# Altium PCB Sampler_DIOT.PCBDOC (part 9 of 10)
Units mm, origin at the board's own origin, x right, y up, seen from the top; angles counter-clockwise.
Board outline 222.9 x 100 mm, 4 copper layers (L1, P2, L3, L4), stack 1.6 mm thick; 697 components, 418 nets, 2175 pads, 1124 vias.
Unrouted connection lines stored in the file: 6.
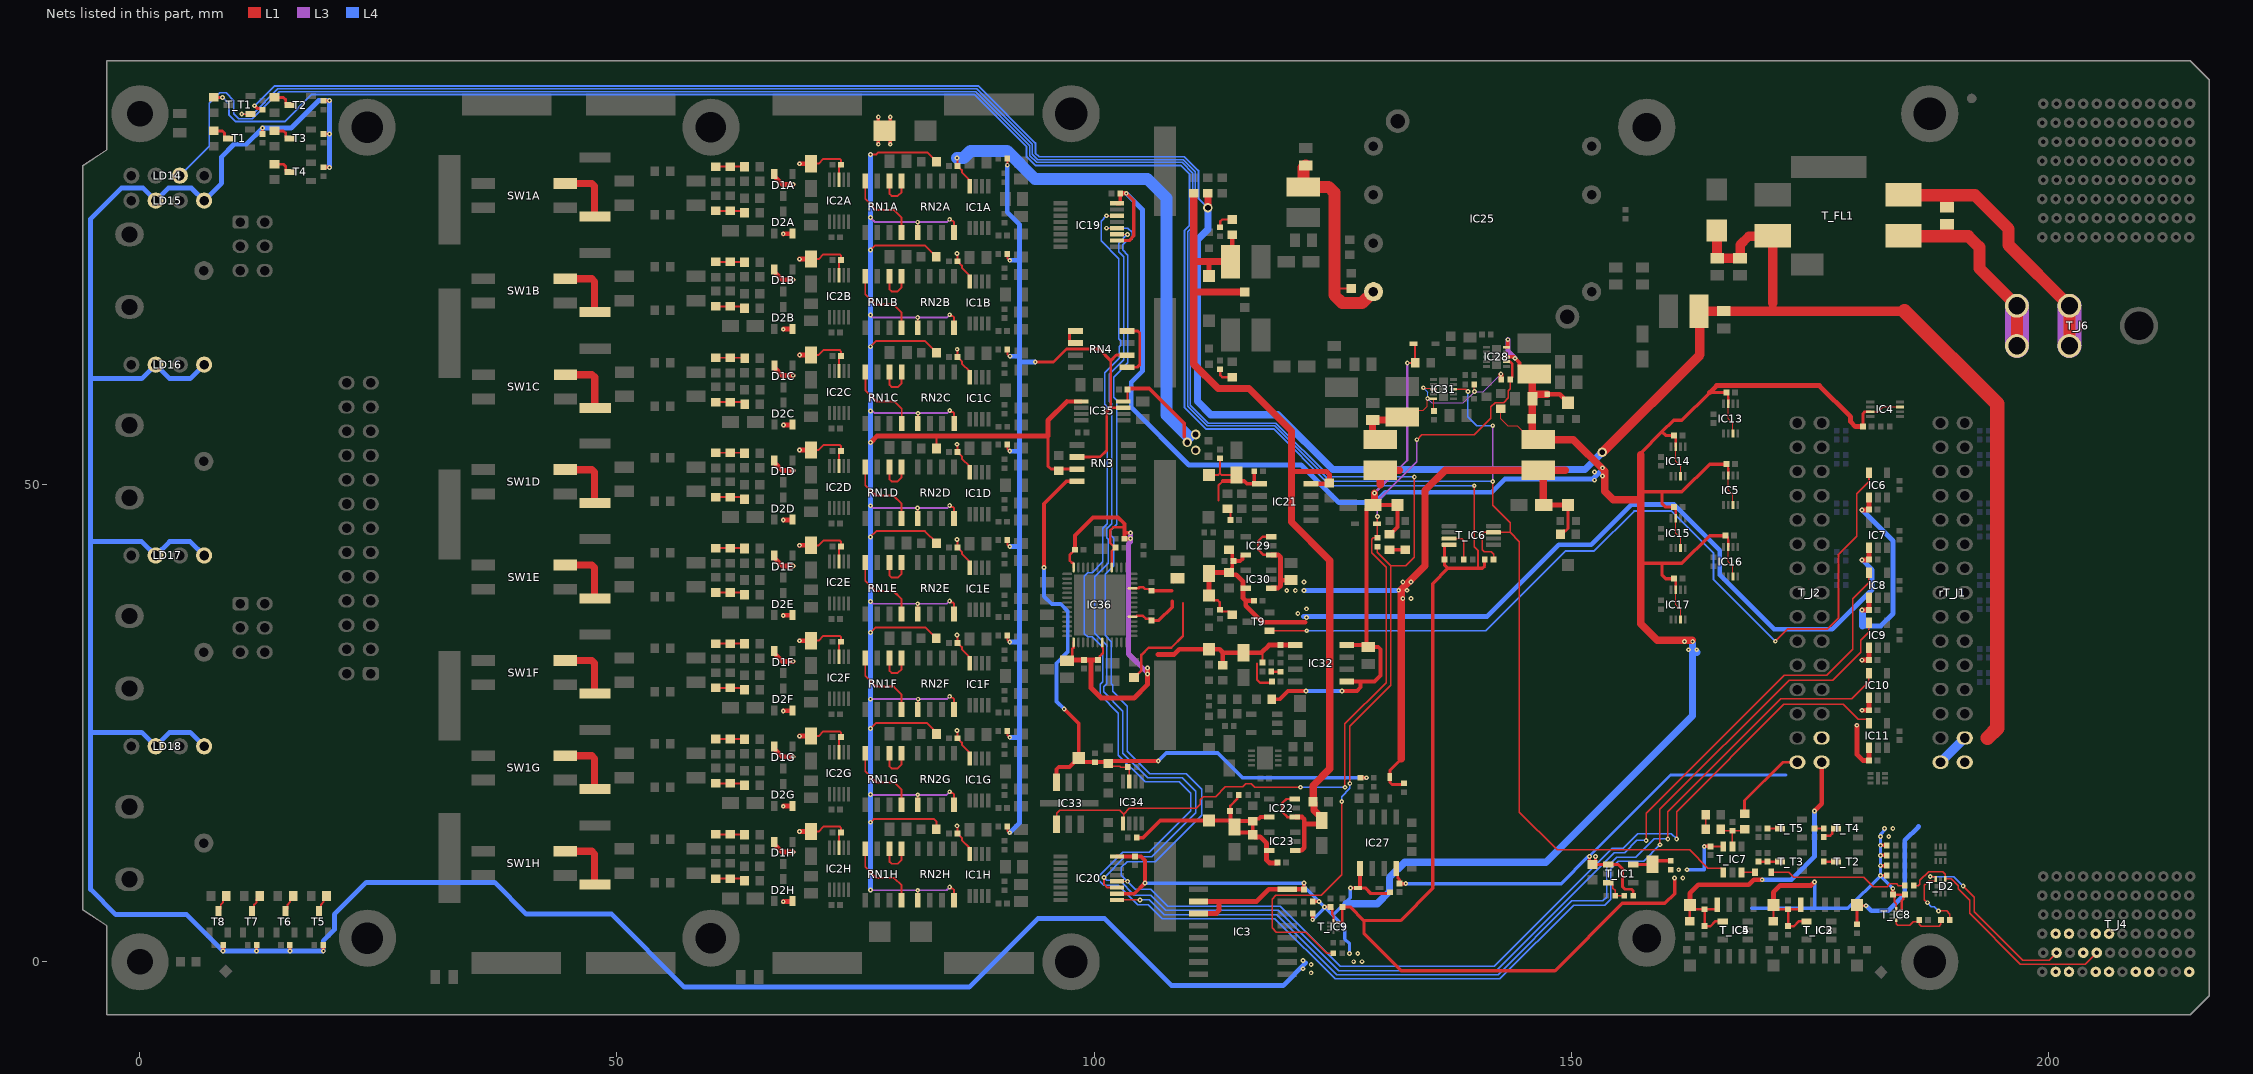
[diagram p9: the nets of this part, all layers, seen from the top]

## Via types
v1: diameter 0.5, hole 0.2, L1 to L4, tented both sides, 1103 vias
v2: diameter 1, hole 0.6, L1 to L4, tented both sides, 15 vias
v3: diameter 0.6, hole 0.3, L1 to L4, tented both sides, 6 vias

## Nets (pads, with @x,y where several pads share a name; then routed paths per layer and width w, separated by ;. In a path a pad name is that pad's centre, name@x,y a point inside that pad or via, vN(x,y) a via of type N, cw(c..) or ccw(c..) an arc to the next point about the centre after c; other vN are vias at no path point) (continued)
NetR2A_2: R2A.2 R3A.1 R4A.2 | length 3
  L1 w0.203: R2A.2@60.352,83.36 R4A.2@61.876,83.36 63.324,83.36 R3A.1@63.362,83.322
NetR2B_2: R2B.2 R3B.1 R4B.2 | length 3
  L1 w0.203: R2B.2@60.352,73.36 63.324,73.36 R3B.1@63.362,73.322
NetR2C_2: R2C.2 R3C.1 R4C.2 | length 3
  L1 w0.203: R2C.2@60.365,63.316 63.337,63.316 R3C.1@63.375,63.278
NetR2D_2: R2D.2 R3D.1 R4D.2 | length 3
  L1 w0.203: R2D.2@60.352,53.36 R4D.2@61.876,53.36 63.324,53.36 R3D.1@63.362,53.322
NetR2E_2: R2E.2 R3E.1 R4E.2 | length 3
  L1 w0.203: R2E.2@60.352,43.36 63.324,43.36 R3E.1@63.362,43.322
NetR2F_2: R2F.2 R3F.1 R4F.2 | length 3
  L1 w0.203: R2F.2@60.352,33.36 R4F.2@61.876,33.36 63.324,33.36 R3F.1@63.362,33.322
NetR2G_2: R2G.2 R3G.1 R4G.2 | length 3
  L1 w0.203: R2G.2@60.352,23.36 63.324,23.36 R3G.1@63.362,23.322
NetR2H_2: R2H.2 R3H.1 R4H.2 | length 3
  L1 w0.203: R2H.2@60.352,13.36 R4H.2@61.876,13.36 63.324,13.36 R3H.1@63.362,13.322
NetR5A_1: R5A.1 SW1A.4 | length 6.4
  L1 w0.203: R5A.1@47.652,78.147 R5A.1@47.694,78.105
  L1 w0.762: SW1A.4@44.586,81.59 47.367,81.59 47.652,81.305 R5A.1@47.652,78.147
NetR5B_1: R5B.1 SW1B.4 | length 6.4
  L1 w0.203: R5B.1@47.652,68.147 R5B.1@47.694,68.105
  L1 w0.762: SW1B.4@44.586,71.59 47.367,71.59 47.652,71.305 R5B.1@47.652,68.147
NetR5C_1: R5C.1 SW1C.4 | length 6.4
  L1 w0.203: R5C.1@47.665,58.103 R5C.1@47.707,58.061
  L1 w0.762: SW1C.4@44.599,61.546 47.38,61.546 47.665,61.261 R5C.1@47.665,58.103
NetR5D_1: R5D.1 SW1D.4 | length 6.4
  L1 w0.203: R5D.1@47.652,48.147 R5D.1@47.694,48.105
  L1 w0.762: SW1D.4@44.586,51.59 47.367,51.59 47.652,51.305 R5D.1@47.652,48.147
NetR5E_1: R5E.1 SW1E.4 | length 6.4
  L1 w0.203: R5E.1@47.652,38.147 R5E.1@47.694,38.105
  L1 w0.762: SW1E.4@44.586,41.59 47.367,41.59 47.652,41.305 R5E.1@47.652,38.147
NetR5F_1: R5F.1 SW1F.4 | length 6.4
  L1 w0.203: R5F.1@47.652,28.147 R5F.1@47.694,28.105
  L1 w0.762: SW1F.4@44.586,31.59 47.367,31.59 47.652,31.305 R5F.1@47.652,28.147
NetR5G_1: R5G.1 SW1G.4 | length 6.4
  L1 w0.203: R5G.1@47.652,18.147 R5G.1@47.694,18.105
  L1 w0.762: SW1G.4@44.586,21.59 47.367,21.59 47.652,21.305 R5G.1@47.652,18.147
NetR5H_1: R5H.1 SW1H.4 | length 6.4
  L1 w0.203: R5H.1@47.652,8.147 R5H.1@47.694,8.105
  L1 w0.762: SW1H.4@44.586,11.59 47.367,11.59 47.652,11.305 R5H.1@47.652,8.147
NetR9A_2: R9A.2 R10A.1 R11A.2 | length 3.1
  L1 w0.203: R9A.2@60.352,78.712 R11A.2@61.876,78.712 63.146,78.712 R10A.1@63.362,78.496
NetR9B_2: R9B.2 R10B.1 R11B.2 | length 3.1
  L1 w0.203: R9B.2@60.352,68.712 63.146,68.712 R10B.1@63.362,68.496
NetR9C_2: R9C.2 R10C.1 R11C.2 | length 3.1
  L1 w0.203: R9C.2@60.365,58.668 63.159,58.668 R10C.1@63.375,58.452
NetR9D_2: R9D.2 R10D.1 R11D.2 | length 3.1
  L1 w0.203: R9D.2@60.352,48.712 63.146,48.712 R10D.1@63.362,48.496
NetR9E_2: R9E.2 R10E.1 R11E.2 | length 3.1
  L1 w0.203: R9E.2@60.352,38.712 63.146,38.712 R10E.1@63.362,38.496
NetR9F_2: R9F.2 R10F.1 R11F.2 | length 3.1
  L1 w0.203: R9F.2@60.352,28.712 R11F.2@61.876,28.712 63.146,28.712 R10F.1@63.362,28.496
NetR9G_2: R9G.2 R10G.1 R11G.2 | length 3.1
  L1 w0.203: R9G.2@60.352,18.712 63.146,18.712 R10G.1@63.362,18.496
NetR9H_2: R9H.2 R10H.1 R11H.2 | length 3.1
  L1 w0.203: R9H.2@60.352,8.712 R11H.2@61.876,8.712 63.146,8.712 R10H.1@63.362,8.496
NetR26_2: R26.2 T1.3 | length 2.1
  L1 w0.3: R26.2@7.7,87.101 8.636,87.101 8.875,86.862 8.875,86.476 9.05,86.301 T1.3@9.25,86.301
NetR28_2: R28.2 T2.3 | length 2.1
  L1 w0.3: R28.2@14.1,90.602 15.036,90.602 15.275,90.363 15.275,89.977 15.45,89.802 T2.3@15.65,89.802
NetR30_2: R30.2 T3.3 | length 2.1
  L1 w0.3: R30.2@14.1,87.101 15.036,87.101 15.275,86.862 15.275,86.476 15.45,86.301 T3.3@15.65,86.301
NetR32_2: R32.2 T4.3 | length 2.1
  L1 w0.3: R32.2@14.1,83.6 15.036,83.6 15.275,83.361 15.275,82.975 15.45,82.8 T4.3@15.65,82.8
NetR34_2: R34.2 T5.3 | length 1.9
  L1 w0.203: T5.3@18.75,5.35 18.973,5.573 18.973,6.002 19.223,6.252 19.223,6.573 R34.2@19.55,6.9
NetR35_2: R35.2 R75.1 | length 0.9
  L1 w0.25: R35.2@118.6,30.424 R75.1@119.546,30.424
NetR37_2: R37.2 T6.3 | length 1.9
  L1 w0.203: T6.3@15.25,5.35 15.473,5.573 15.473,6.002 15.723,6.252 15.723,6.573 R37.2@16.05,6.9
NetR38_2: R38.2 T7.3 | length 1.9
  L1 w0.203: T7.3@11.746,5.35 11.969,5.573 11.969,6.002 12.22,6.252 12.22,6.573 R38.2@12.546,6.9
NetR40_2: R40.2 T8.3 | length 1.9
  L1 w0.203: T8.3@8.243,5.35 8.466,5.573 8.466,6.002 8.717,6.252 8.717,6.573 R40.2@9.043,6.9
NetR45_2: R45.2 R46.1 | length 1.9
  L1 w0.25: R45.2@113.221,77.01 113.221,77.587 113.444,77.81 R46.1@114.5,77.81
NetR50_2: R50.2 R84.1 | length 1.6
  L1 w0.4: R84.1@130.975,43.2 R50.2@132.625,43.2
NetR93_2: R93.2 R94.1 | length 1.9
  L1 w0.25: R93.2@113.221,62.09 113.221,61.513 113.444,61.29 R94.1@114.5,61.29
NetRN1A_4: RN1A.4 RN1A.8 | length 8.1
  L1 w0.203: RN1A.8@76.024,81.76 76.024,79.965 77.195,78.794 79.056,78.794 79.834,78.017 RN1A.4@79.834,76.36
NetRN1A_5: RN1A.5 RN1A.6 | length 4
  L1 w0.203: RN1A.6@78.558,81.857 78.558,80.516 78.794,80.28 79.419,80.28 79.828,80.689 RN1A.5@79.828,81.857
NetRN1B_4: RN1B.4 RN1B.8 | length 8.1
  L1 w0.203: RN1B.8@76.024,71.76 76.024,69.965 77.084,68.905 78.946,68.905 79.834,68.017 RN1B.4@79.834,66.36
NetRN1B_5: RN1B.5 RN1B.6 | length 4
  L1 w0.203: RN1B.6@78.558,71.857 78.558,70.516 78.794,70.28 79.419,70.28 79.828,70.689 RN1B.5@79.828,71.857
NetRN1C_4: RN1C.4 RN1C.8 | length 8.1
  L1 w0.203: RN1C.8@76.037,61.716 76.037,59.921 77.204,58.754 79.066,58.754 79.847,57.973 RN1C.4@79.847,56.316
NetRN1C_5: RN1C.5 RN1C.6 | length 4
  L1 w0.203: RN1C.6@78.571,61.813 78.571,60.472 78.807,60.236 79.432,60.236 79.841,60.646 RN1C.5@79.841,61.813
NetRN1D_4: RN1D.4 RN1D.8 | length 8.1
  L1 w0.203: RN1D.8@76.024,51.76 76.024,49.965 77.11,48.879 78.972,48.879 79.834,48.017 RN1D.4@79.834,46.36
NetRN1D_5: RN1D.5 RN1D.6 | length 4
  L1 w0.203: RN1D.6@78.544,51.93 78.544,50.588 78.78,50.353 79.405,50.353 79.814,50.762 RN1D.5@79.814,51.93
NetRN1E_4: RN1E.4 RN1E.8 | length 8.1
  L1 w0.203: RN1E.8@76.024,41.76 76.024,39.965 77.121,38.868 78.983,38.868 79.834,38.017 RN1E.4@79.834,36.36
NetRN1E_5: RN1E.5 RN1E.6 | length 4
  L1 w0.203: RN1E.6@78.558,41.857 78.558,40.516 78.794,40.28 79.419,40.28 79.828,40.689 RN1E.5@79.828,41.857
NetRN1F_4: RN1F.4 RN1F.8 | length 8.1
  L1 w0.203: RN1F.8@76.024,31.76 76.024,29.965 77.154,28.836 79.015,28.836 79.834,28.017 RN1F.4@79.834,26.36
NetRN1F_5: RN1F.5 RN1F.6 | length 4
  L1 w0.203: RN1F.6@78.558,31.857 78.558,30.516 78.794,30.28 79.419,30.28 79.828,30.689 RN1F.5@79.828,31.857
NetRN1G_4: RN1G.4 RN1G.8 | length 8.1
  L1 w0.203: RN1G.8@76.024,21.76 76.024,19.965 77.177,18.813 79.038,18.813 79.834,18.017 RN1G.4@79.834,16.36
NetRN1G_5: RN1G.5 RN1G.6 | length 4
  L1 w0.203: RN1G.6@78.558,21.857 78.558,20.516 78.794,20.28 79.419,20.28 79.828,20.689 RN1G.5@79.828,21.857
NetRN1H_4: RN1H.4 RN1H.8 | length 8.1
  L1 w0.203: RN1H.8@76.024,11.76 76.024,9.965 77.225,8.764 79.086,8.764 79.834,8.017 RN1H.4@79.834,6.36
NetRN1H_5: RN1H.5 RN1H.6 | length 4
  L1 w0.203: RN1H.6@78.558,11.857 78.558,10.516 78.794,10.28 79.419,10.28 79.828,10.689 RN1H.5@79.828,11.857
NetRN4_1: RN4.1 RN4.2 | length 2.3
  L1 w0.3: RN4.2@98.05,64.86 97.58,64.86 97.43,65.01 97.43,65.98 97.58,66.13 RN4.1@98.05,66.13
NetRN4_5: RN4.5 RN4.8 | length 6.2
  L1 w0.3: RN4.5@103.45,62.32 104.532,62.32 104.792,62.58 104.792,65.928 104.59,66.13 RN4.8@103.45,66.13
NetT_C2_1: T_C2.1 T_IC1.5 T_R2.1 | length 4.1
  L1 w0.35: T_IC1.5@156.525,10.2 158.525,10.2 T_C2.1@158.55,10.225 158.92,10.595 T_R2.1@160.45,10.595
NetT_C11_1: T_C11.1 T_FL1.3 T_J6.1 T_J6.2 | length 32.5
  L1 w1.27: T_FL1.3@184.875,80.35 189.324,80.35 ; 189.4,80.35 192.35,80.35 195.868,76.832 195.868,75.134 T_J6.1@202.235,68.767 T_J6.2@202.235,64.567
  L1 w1.4: T_C11.1@189.4,79.3 189.4,80.274
  L3 w2.5: T_J6.2@202.235,64.567 T_J6.1@202.235,68.767
NetT_C11_2: T_C11.2 T_FL1.1 T_J6.3 T_J6.4 | length 25.5
  L1 w1.27: T_FL1.1@184.875,76.05 189.333,76.05 ; 189.4,76.05 191.65,76.05 192.8,74.9 192.8,72.702 T_J6.3@196.735,68.767 T_J6.4@196.735,64.567
  L1 w1.4: 189.4,76.117 T_C11.2@189.4,77.1
  L3 w2.5: T_J6.4@196.735,64.567 T_J6.3@196.735,68.767
NetT_C13_1: T_C13.1 T_IC7.5 T_R29.1 T_R30.2 | length 4.3
  L1 w0.152: T_R30.2@165.707,13.9 165.871,13.736 T_C13.1@166.919,13.736 ; T_IC7.5@166.919,12.086 T_C13.1@166.919,13.736 ; T_R29.1@168.2,13.9 168.036,13.736 T_C13.1@166.919,13.736
NetT_C14_1: T_C14.1 T_C21.2 | length 1
  L1 w0.25: T_C14.1@175.542,13.977 T_C21.2@176.493,13.977
NetT_C15_1: T_C15.1 T_T5.3 | length 1.3
  L1 w0.254: T_C15.1@170.609,13.977 T_T5.3@171.916,13.977
NetT_C17_1: T_C17.1 T_T2.3 | length 1.3
  L1 w0.25: T_C17.1@176.493,10.5 T_T2.3@177.8,10.5
NetT_C18_1: T_C18.1 T_C19.1 T_T3.3 | length 2.3
  L1 w0.25: T_C18.1@169.658,10.5 T_C19.1@170.609,10.5 T_T3.3@171.916,10.5
NetT_C21_1: T_C21.1 T_T4.3 | length 1.9
  L1 w0.25: T_C21.1@176.493,13.077 176.641,13.225 177.175,13.225 177.4,13.45 177.4,13.777 177.6,13.977 T_T4.3@177.8,13.977
NetT_D2_4: T_D2.4 T_J4.H2 T_R15.2 | length 25.8
  L1 w0.152: T_R15.2@185.942,7.99 186.419,7.99 186.576,8.148 186.576,8.542 187.488,9.454 188.966,9.454 189.231,9.189 T_D2.4@189.231,8.693 189.858,8.693 190.6,7.951 190.6,7.649 191.797,6.452 191.797,5.07 197.108,-0.241 203.91,-0.241 T_J4.H2@205.1,0.95
NetT_D2_6: T_D2.6 T_J4.K2 T_R17.2 | length 25.3
  L1 w0.152: v1(187.375,6.2) 187.05,6.525 187.05,8.031 187.482,8.463 T_D2.6@188.157,8.463 ; v1(187.654,8.932) T_D2.6@188.26,8.932 ; v1(188.507,5.332) 189.368,5.332 189.72,4.98 T_R17.2@189.72,4.4 ; v1(191.105,7.933) 192.262,6.777 192.262,5.263 197.362,0.162 200.112,0.162 T_J4.K2@200.855,0.905
  L4 w0.152: v1(187.375,6.2) 187.786,5.789 188.049,5.789 v1(188.507,5.332) ; v1(187.654,8.932) 190.107,8.932 v1(191.105,7.933)
NetT_D6_2: T_D6.2 T_IC7.3 | length 1.4
  L1 w0.152: T_IC7.3@167.869,9.386 167.874,9.391 T_D6.2@169.276,9.391
NetT_IC1_3: T_IC1.3 T_R4.2 T_R7.2 | length 2.9
  L1 w0.152: T_IC1.3@153.925,8.3 154.175,8.3 154.399,8.076 154.399,7.701 154.62,7.48 T_R7.2@154.62,6.925 T_R4.2@155.68,6.925
NetT_IC6_7: T_IC6.7 T_R25.2 | length 3.6
  L1 w0.152: T_IC6.7@137.225,44.367 138.525,44.367 138.75,44.142 T_R25.2@138.75,42.184
NetT_R9_2: T_R9.2 T_R30.1 | length 1.5
  L1 w0.152: T_R30.1@164.106,13.9 T_R9.2@164.107,15.4
P2V5A: C16.2 C71.2 C75.2 C76.2 C77.1 C92.2 C93.2 C94.2 IC7.1 IC29.5 IC30.5 IC36.31 IC36.37 R70.2 R76.1 R77.1 R91.1 TP10.1 | length 125.6
  L1 w0.25: R77.1@104.194,29.805 104.244,29.805 104.968,30.529 104.968,32.168 105.725,32.925 108.101,32.925 109.325,34.149 109.325,37.6 ; TP10.1@112.05,38.406 112.56,37.896 112.954,37.896 113.2,37.65 R91.1@113.2,36.89 113.365,36.725 113.526,36.725 113.531,36.72 114.18,36.72 R76.1@114.5,36.4
  L1 w0.254: IC36.31@104.039,36.165 104.394,36.165 104.49,36.261 105.133,36.261 105.438,35.956 C92.2@105.98,35.956 ; IC36.37@104.039,39.165 104.68,39.165 104.76,39.246 105.178,39.246 105.345,39.079 105.695,39.079 C93.2@105.878,38.896 ; C94.2@108.329,39.807 C94.2@108.752,40.23
  L1 w0.35: C92.2@106.034,35.782 106.807,35.782 108.2,37.175 108.2,37.8 ; C93.2@106.034,38.896 108.154,38.896
  L1 w0.4: C71.2@114.15,40.8 114.175,40.8 114.45,41.075 114.45,41.27 114.49,41.309 114.49,41.656 ; R70.2@114.15,43.2 114.2,43.2 114.49,42.91 114.49,42.11 C76.2@114.6,42 ; 114.49,41.656 114.49,41.89 C76.2@114.6,42 ; IC29.5@115.9,42.65 115.625,42.65 115.55,42.575 115.55,42.234 115.316,42 C76.2@114.6,42
  L1 w0.508: TP10.1@112.05,38.406 C77.1@112.05,40.7 112.15,40.8 C71.2@114.15,40.8 114.371,40.579 114.917,40.579 115.604,39.892 115.604,39.171 115.625,39.15 IC30.5@115.643,39.15 ; IC30.5@115.604,39.129 115.604,38.148 115.902,37.85 ; IC30.5@115.622,39.129 IC30.5@115.643,39.15 ; IC30.5@115.9,39.15 IC30.5@115.643,39.15 ; C75.2@116.75,37.85 115.902,37.85 ; 122.15,35.6 117.625,35.6 115.902,37.323 115.902,37.85 ; v1(180.502,42.12) 181.227,42.12 IC7.1@181.227,43.42
  L4 w0.5: 121.95,36.188 141.188,36.188 148.721,43.721 152.121,43.721 156.325,47.925 160.825,47.925 165.6,43.15 165.6,40.55 171.285,34.865 177.39,34.865 181.55,39.025 181.55,41.072 v1(180.502,42.12)
  other v1: 122.275,36.1 121.365,36.515 122.275,37
P3V3: C15.2 C17.2 C18.2 C19.2 C20.2 C21.2 C22.2 C23.2 C24.2 C25.2 C27.2 C28.2 C30.2 C32.2 C33.2 C69.2 C70.2 D9.1 IC3.2 IC3.3 IC3.16 IC4.3 IC4.7 IC5.3 IC5.7 IC6.1 IC8.1 IC9.1 IC10.1 IC11.1 IC13.3 IC13.7 IC14.3 IC14.7 IC15.3 IC15.7 IC16.3 IC16.7 IC17.3 IC17.7 IC19.10 IC19.16 IC20.10 IC20.16 IC27.5 IC28.8 IC28.10 L7.2 L8.1 LD15.2 LD15.4 LD16.2 LD16.4 LD17.2 LD17.4 LD18.2 LD18.4 R25.1 R27.1 R29.1 R31.1 R33.1 R36.1 R39.1 R43.1 R65.2 R66.2 R87.2 T_C25.2 T_IC9.1 T_R67.2 T_R68.2 TP17.1 | length 694.9
  L1 w0.127: IC20.16@102.399,11.037 IC20.16@102.444,11.082 ; C33.2@104.287,11.037 C33.2@104.3,11.05 ; R66.2@143.077,57.583 142.691,57.97 R66.2@142.641,57.97 142.641,56.909 143.345,56.205 144.344,56.205 145.821,54.729 146.567,54.729 L8.1@146.571,54.729 ; IC15.7@160.973,46.49 IC15.7@160.977,46.494 160.977,44.944 161.477,44.444 IC15.3@161.477,43.394 ; IC17.7@160.977,38.995 160.977,37.444 161.477,36.944 IC17.3@161.477,35.895 ; IC14.7@160.978,53.994 160.978,52.444 161.478,51.944 IC14.3@161.478,50.894 ; IC16.7@166.478,43.495 166.478,41.944 166.978,41.444 IC16.3@166.978,40.395 ; IC5.7@166.478,50.994 166.478,49.444 166.978,48.944 IC5.3@166.978,47.894 ; IC13.7@166.478,58.494 166.478,56.944 166.978,56.444 IC13.3@166.978,55.394 ; IC4.7@181.367,57.664 182.218,57.664 182.718,58.164 IC4.3@184.467,58.164
  L1 w0.22: T_C25.2@124.977,5.57 124.977,4.979 125.1,4.855 T_IC9.1@125.1,4.23
  L1 w0.25: T_C25.2@124.8,5.746 T_C25.2@124.977,5.57 ; C30.2@160.777,40.17 160.958,39.989 160.958,39.723 160.977,39.704 IC17.7@160.977,38.995 ; C27.2@160.777,47.669 160.958,47.488 160.958,47.223 160.977,47.204 IC15.7@160.977,46.494 ; C25.2@160.778,55.169 160.958,54.988 160.958,54.723 160.978,54.703 IC14.7@160.978,53.994 ; C28.2@166.278,44.67 166.459,44.489 166.459,44.223 166.478,44.204 IC16.7@166.478,43.495 ; C18.2@166.278,52.169 166.459,51.989 166.459,51.723 166.478,51.704 IC5.7@166.478,50.994 ; C24.2@166.278,59.669 166.459,59.488 166.459,59.223 166.478,59.204 IC13.7@166.478,58.494
  L1 w0.3: C17.2@180.6,56.1 180.6,57.475 180.789,57.664 IC4.7@181.367,57.664
  L1 w0.35: v1(8.713,1.124) R43.1@8.713,1.775 ; v1(12.216,1.124) R39.1@12.216,1.775 ; R25.1@12.85,86.746 v1(12.85,87.398) ; v1(15.72,1.124) R36.1@15.72,1.775 ; v1(19.22,1.124) R33.1@19.22,1.775 ; R31.1@19.225,83.27 v1(19.876,83.27) ; R29.1@19.225,86.771 v1(19.876,86.771) ; R27.1@19.225,90.272 v1(19.876,90.272) ; IC19.10@102.399,75.6 103.679,75.6 104.175,76.096 104.175,79.76 v1(103.382,80.554) ; C15.2@122,7.601 v1(122,8.252) ; v1(122.92,4.41) T_R68.2@122.92,5.061 ; T_R67.2@122.92,6.331 v1(123.571,6.331) ; v1(124.149,5.746) T_C25.2@124.8,5.746 ; v1(126.874,7.742) D9.1@127.525,7.742 ; D9.1@127.646,7.742 127.836,7.742 128.433,7.742 129.014,7.161 130.926,7.161 R65.2@131.036,7.272 ; 157.3,49.275 159.536,49.275 ; 157.3,53.328 159.536,55.564 ; 157.445,41.775 159.536,41.775 ; C30.2@160.777,40.17 159.93,40.17 159.536,40.564 159.536,41.775 ; C27.2@160.777,47.669 159.931,47.669 159.536,48.064 159.536,49.275 ; C25.2@160.778,55.169 159.931,55.169 159.536,55.564 ; C28.2@166.278,44.67 164.52,44.67 161.625,41.775 159.536,41.775 ; C18.2@166.278,52.169 164.52,52.169 161.625,49.275 159.536,49.275 ; C24.2@166.278,59.669 164.52,59.669 161.625,56.774 160.746,56.774 159.536,55.564
  L1 w0.381: IC28.8@143.242,63.415 143.996,63.415 v1@144.115,63.295 ; IC28.10@143.242,64.415 143.378,64.55 v1(143.378,65.215) ; v1(144.141,63.27) 144.606,62.804 144.606,62.444 145.415,61.635 L7.2@146.165,61.635
  L1 w0.4: IC20.10@102.399,7.137 104.221,7.137 v1(105.342,8.258) 105.342,10.608 104.913,11.037 104.287,11.037 IC20.16@102.399,11.037 ; IC19.16@102.399,79.5 102.727,79.5 102.752,79.525 C32.2@102.752,80.554 ; D9.1@127.836,7.742 127.881,7.787 IC27.5@127.881,9.792
  L1 w0.5: C69.2@147.532,59.494 148.804,59.494 TP17.1@149.7,58.597 ; 164.52,59.669 165.251,60.4 176.043,60.4 179.3,57.143 179.3,56.6 179.8,56.1 C17.2@180.6,56.1
  L1 w0.508: C32.2@102.902,80.554 v1(103.382,80.554) ; IC3.3@110.955,5.061 112.796,5.061 113.094,5.359 113.094,6.331 ; IC3.2@110.955,6.331 113.094,6.331 ; C15.2@122,7.601 IC3.16@120.255,7.601 118.329,7.601 117.059,6.331 113.094,6.331 ; v1(179.959,24.792) 179.959,21.746 180.586,21.12 C23.2@181.227,21.12 IC11.1@181.227,22.42 ; v1(180.502,26.37) C22.2@181.227,26.37 IC10.1@181.227,27.67 ; v1(180.502,31.62) C21.2@181.227,31.62 IC9.1@181.227,32.92 ; v1(180.502,36.87) 181.227,36.87 C20.2@181.227,36.895 IC8.1@181.227,38.17 ; v1(180.502,47.37) 181.227,47.37 C19.2@181.227,47.395 IC6.1@181.227,48.67
  L1 w0.762: L7.2@146.165,61.635 145.948,61.417 C70.2@145.948,59.018 ; L8.1@146.567,54.729 145.948,55.348 C70.2@145.948,59.018 ; L8.1@146.571,54.729 150.246,54.729 153.525,51.45 153.525,49.325 154.425,48.425 157.3,48.425 ; C69.2@147.512,59.494 146.423,59.494 C70.2@145.948,59.018 ; 157.3,53.167 157.3,49.275 157.3,48.425 ; v1@162.718,33.7 159.05,33.7 157.3,35.45 157.3,48.425
  L3 w0.508: v1(143.378,65.215) 143.378,64.032 v1@144.133,63.277
  L4 w0.35: v1@105.4,8.3 105.448,8.252 v1(122,8.252) 122.029,8.224 122.029,7.874 v1(123.571,6.331) 123.571,6.327 124.149,5.75 v1(124.149,5.746) ; v1(122.92,4.41) 124.12,5.609 124.12,5.718 v1(124.149,5.746) ; v1(126.788,0.875) 126.788,1.876 126.275,2.389 126.275,3.62 125.026,4.869 ; v1(126.874,7.742) 126.874,6.717 125.026,4.869 ; v1(124.149,5.746) 125.026,4.869
  L4 w0.5: 0.323,81.103 -1.972,81.103 -5.183,77.892 -5.183,61.132 -5.183,44.05 -5.183,24.05 -5.183,7.583 -2.546,4.946 4.891,4.946 v1(8.713,1.124) v1(12.216,1.124) v1(15.72,1.124) v1(19.22,1.124) 19.22,2.195 20.375,3.35 20.375,4.975 23.725,8.325 37.175,8.325 40.5,5 49.425,5 57.072,-2.647 86.933,-2.647 94.11,4.53 101.12,4.53 108.135,-2.485 119.815,-2.485 122.2,-0.1
  L4 w0.508: -5.183,24.05 0.181,24.05 LD18.2@1.64,22.591 3.099,24.05 5.261,24.05 LD18.4@6.72,22.591 ; -5.183,44.05 0.181,44.05 LD17.2@1.64,42.591 3.099,44.05 5.261,44.05 LD17.4@6.72,42.591 ; -5.183,61.132 0.181,61.132 LD16.2@1.64,62.591 3.099,61.132 5.261,61.132 LD16.4@6.72,62.591 ; 0.323,81.103 LD15.2@1.64,79.786 2.957,81.103 5.403,81.103 LD15.4@6.72,79.786 8.55,81.616 8.55,84.393 9.857,85.7 11.153,85.7 v1(12.85,87.398) 15.841,87.398 18.715,90.272 v1(19.876,90.272) v1(19.876,86.771) v1(19.876,83.27) ; v1(103.382,80.554) 105.075,78.86 105.075,61.925 103.911,60.761 103.911,58.114 109.95,52.075 121.73,52.075 125.662,48.143 129.458,48.143 130.542,49.227 141.677,49.227 143.05,50.6 152.25,50.6 153.2,51.55 ; v1(180.502,47.37) 183.75,44.122 183.75,36.478 182.488,35.216 180.55,35.216
  L4 w0.762: 126.425,6.1 129.7,6.1 130.975,7.375 130.975,8.85 132.575,10.45 147.375,10.45 162.725,25.8 162.725,32.447 ; v1@162.725,33.575 162.725,32.447 ; 163.181,32.447 162.725,32.447 ; 180.55,35.216 v1@180.55,36.7
  other v1: 122.762,-1.156 121.9,-0.725 122.762,-0.294 127.219,0.013 128.081,0.013 121.9,0.137 127.65,0.875 162.319,32.713 163.181,32.713 161.888,33.575 162.75,33.575 152.45,50.488 153.312,50.919 152.45,51.35 153.312,51.781
P3V3_MP: R89.2 rT_J1.30 T_C3.2 T_C4.2 T_C8.2 T_C20.2 T_C22.2 T_C23.2 T_C24.2 T_IC2.4 T_IC3.8 T_IC6.8 T_IC7.6 T_IC8.1 T_IC8.8 T_IC9.8 T_R1.2 T_R2.2 T_R8.2 T_R31.2 T_R32.2 T_R33.2 T_R34.2 TP18.1 | length 327.1
  L1 w0.152: rT_J1.30@191.12,20.92 rT_J1.30@191.27,20.92
  L1 w0.2: v1(139.857,49.898) 139.857,43.518 140.245,43.13 140.245,41.249 ; T_C22.2@183.9,6.873 183.9,6.271 184.091,6.08 T_IC8.1@184.091,5.488
  L1 w0.25: T_IC9.8@125.575,4.1 125.853,4.1 126.037,4.284 T_C24.2@126.037,5.734
  L1 w0.254: T_C20.2@164.62,12.086 T_IC7.6@165.969,12.086 ; R89.2@171.221,4.249 TP18.1@171.221,5.72 ; TP18.1@171.304,5.72 171.511,5.513 T_C4.2@172.753,5.513 ; T_IC3.8@174.078,5.984 174.078,5.686 173.905,5.513 T_C4.2@172.753,5.513 ; T_C22.2@183.9,6.873 T_C22.2@183.73,7.042 T_C23.2@185,7.042 184.827,6.869 184.827,6.565 184.665,6.403 T_IC8.8@184.665,5.373 ; T_C4.2@172.753,5.513 T_C3.2@172.753,3.734 173.361,3.734 173.861,4.234 ; 173.861,4.234 T_IC2.4@174.683,4.234 173.861,4.234
  L1 w0.35: T_R1.2@7.75,90.602 v1(8.655,90.602) ; T_C24.2@126.05,5.746 126.879,5.746 128.3,4.325 ; T_IC6.8@137.225,43.717 136.788,43.717 136.738,43.667 T_C8.2@136.738,42.184 136.738,41.612 137.101,41.249 ; T_R8.2@140.935,42.184 140.935,41.485 140.699,41.249 140.245,41.249 137.101,41.249 ; v1(160.857,8.793) 160.857,7.132 159.85,6.125 155.375,6.125 148.325,-0.925 132.22,-0.925 128.3,2.995 128.3,4.325 ; v1(163.969,12.096) T_C20.2@164.62,12.096 ; v1(182.441,9.044) T_R31.2@183.092,9.044 ; v1(182.441,10.078) T_R32.2@183.092,10.078 ; v1(182.441,11.153) T_R33.2@183.092,11.153 ; v1(182.441,12.207) T_R34.2@183.092,12.207 ; T_C22.2@183.73,7.042 183.73,7.688 v1(183.732,7.691) ; 128.3,4.325 132.129,4.325 135.5,7.696 135.5,39.648 137.101,41.249
  L1 w0.5: TP18.1@171.221,5.803 TP18.1@171.221,5.949 171.221,7.3 171.929,8.008 175.171,8.008 v1(175.531,8.368)
  L4 w0.2: v1(8.655,90.602) 9.325,89.933 9.325,88.8 10.046,88.079 15.15,88.079 17.972,90.9 87.475,90.9 92.944,85.431 92.944,84.381 93.855,83.47 109.102,83.47 110.029,82.543 110.029,77.204 109.486,76.661 109.486,58.08 111.714,55.852 118.819,55.852 124.773,49.898 v1(139.857,49.898)
  L4 w0.35: v1(162.15,9.655) 163.969,9.655 v1(163.969,12.096) ; 168.95,5.6 175.531,5.6 ; v1(175.531,8.368) 175.531,5.6 ; v1@182.95,13.9 182.441,13.391 v1(182.441,13.125) v1(182.441,12.207) v1(182.441,11.153) v1(182.441,10.078) v1(182.441,9.044) ; v1(183.732,7.691) 182.441,8.982 v1(182.441,9.044) ; 175.531,5.6 178.997,5.6 v1(182.441,9.044)
  other v1: 161.719,8.793 161.288,9.655 183.303,13.125 182.872,13.987 183.735,13.987
P3V3_MP2: R90.2 T_C5.2 T_C6.2 T_IC4.4 T_IC5.8 T_J2.30 TP19.1 | length 35.3
  L1 w0.254: R90.2@162.465,4.249 TP19.1@162.465,5.72 ; TP19.1@162.755,5.513 T_C6.2@163.997,5.513 ; T_IC5.8@165.323,5.984 165.323,5.686 165.15,5.513 T_C6.2@163.997,5.513 ; T_C6.2@163.997,5.513 T_C5.2@163.997,3.734 164.605,3.734 165.105,4.234 ; 165.105,4.234 T_IC4.4@165.928,4.234 165.105,4.234
  L1 w0.5: TP19.1@162.465,5.874 162.465,7.19 163.348,8.073 168.623,8.073 169.151,8.601 v1(170.034,8.601) ; v1(175.514,15.805) 176.27,16.561 T_J2.30@176.27,20.92
  L4 w0.5: v1(170.034,8.601) 173.101,8.601 175.514,11.014 v1(175.514,15.805)
P3V3A: C67.1 C68.2 D7.1 IC29.1 IC29.3 IC30.1 L8.2 R60.2 R88.2 TP11.1 | length 79.7
  L1 w0.25: IC29.1@118.6,42.65 117.775,42.65 117.22,43.204 117.22,44.095 117.675,44.55 IC29.3@118.6,44.55
  L1 w0.3: 132.198,21.273 131.011,20.086 D7.1@131.011,19.382 131.011,18.802 131.241,18.573 132.373,18.573 R60.2@132.511,18.712 ; R88.2@148.9,44.8 148.9,44.85 149.2,45.15 149.438,45.15 149.7,45.412 TP11.1@149.7,47.88
  L1 w0.5: IC30.1@118.6,39.15 118.625,39.175 119.282,39.175 119.55,39.443 119.55,40 ; IC29.1@118.6,42.65 119.3,42.65 119.55,42.4 119.55,40 ; C68.2@120.65,40 119.55,40 ; C67.1@147.15,47.88 TP11.1@149.7,47.88
  L1 w0.762: 132.198,21.273 132.198,39.023 134.7,41.525 134.7,49.425 136.804,51.529 L8.2@146.571,51.529 ; C67.1@147.1,48.15 147.1,50.999 L8.2@146.571,51.529 ; 149.42,51.529 L8.2@146.571,51.529
  L4 w0.5: v1(122,38.915) 132.39,38.915 132.4,38.925
  other v1: 132.369,38.088 133.231,38.088 120.2,38.915 121.1,38.915 131.938,38.95 132.8,38.95 122,39.815 132.369,39.812 133.231,39.812
P5V0A: C82.1 C83.2 C84.1 C87.2 C88.2 C89.2 C90.2 C91.2 IC32.1 IC36.15 IC36.21 IC36.44 IC36.52 R73.2 R78.2 R85.2 TP13.1 | length 74.7
  L1 w0.25: 117.089,31.275 117.089,29.561 117.4,29.25 118.507,29.25 C82.1@118.646,29.389 ; 117.55,32.4 117.66,32.29 R73.2@117.66,31.364 R73.2@117.618,31.406
  L1 w0.254: C91.2@97.323,31.604 97.371,31.652 97.7,31.98 97.7,32.775 97.864,32.939 IC36.15@97.864,33.49 ; IC36.52@97.864,41.34 97.864,41.736 97.774,41.826 97.683,41.826 97.438,42.07 97.438,42.635 C90.2@98,43.197 ; C87.2@100.432,31.65 100.615,31.833 100.615,32.025 100.944,32.354 100.944,32.867 100.864,32.948 IC36.21@100.864,33.49 ; IC36.44@101.864,41.34 101.864,43.052 C89.2@102.219,43.407 ; C89.2@102.258,43.447 C89.2@102.219,43.407 ; 103.187,45.55 102.022,45.55 101.694,45.223 101.694,43.932 C89.2@102.219,43.407
  L1 w0.35: 103.177,44.969 103.187,44.969 v1(103.829,44.969) ; R78.2@103.187,44.361 v1(103.838,44.361)
  L1 w0.4: C90.2@98,43.197 98,44.675 99.9,46.575 102.525,46.575 103.187,45.913 103.187,45.55 103.187,44.969 R78.2@103.187,44.361
  L1 w0.508: C91.2@97.155,31.557 97.25,31.652 97.371,31.652 C88.2@98.932,31.652 ; C88.2@98.933,31.65 99.683,31.65 ; C87.2@100.432,31.65 99.683,31.65 ; v1(105.597,30.787) 105.597,29.041 104.211,27.655 100.745,27.655 99.683,28.717 99.683,31.65 ; 106.7,32.225 108.4,32.225 108.938,32.763 TP13.1@112.05,32.763 113.162,32.763 113.5,32.425 ; R85.2@113.5,31.1 113.5,32.425 ; IC32.1@121.096,33.199 119.547,33.2 118.35,33.2 117.55,32.4 C84.1@115.65,32.4 113.525,32.4 113.5,32.425
  L3 w0.508: v1(103.829,44.969) 103.829,44.015 103.618,43.804 103.618,32.266 105.597,30.287 v1@105.597,30.13
  other v1: 105.607,30.179
P6V0: C78.2 C79.2 IC31.8 IC31.10 L9.2 L10.1 R69.2 R72.2 | length 24.1
  L1 w0.127: L9.2@132.547,57.113 132.547,57.79 134.523,57.79 134.95,58.217 v1@134.95,58.979 ; v1(134.523,60.17) 134.594,60.098 135.229,60.098 135.241,60.087 135.241,60.055 135.556,60.055 IC31.8@135.591,60.02 ; v1@135.209,59.02 IC31.10@135.591,59.02 135.591,57.72 C78.2@135.641,57.72 ; R72.2@139.861,60.52 139.861,59.8 v1(139.891,59.77) ; v1(142.641,61.615) v1@142.671,61.585
  L1 w0.508: R69.2@142.671,61.02 v1@142.671,61.585
  L1 w0.762: L10.1@130,54.729 129.2,55.529 C79.2@129.2,56.8 131.881,56.8 L9.2@132.176,57.095
  L3 w0.127: v1@134.991,59.02 135.406,58.604 138.725,58.604 v1(139.891,59.77) 140.796,59.77 v1(142.641,61.615)
  L4 w0.127: v1(134.523,60.17) 134.976,59.717 v1(134.976,59.058)
P6V0A: C80.1 C81.2 D8.1 IC32.5 IC32.8 L10.2 R53.2 R64.2 R84.2 TP12.1 | length 65.5
  L1 w0.254: v1(132.841,62.77) R64.2@133.648,62.77 ; D8.1@133.501,64.77 133.545,64.77 133.648,64.667 133.648,62.838 R64.2@133.691,62.795
  L1 w0.4: R53.2@118.637,27.5 118.65,27.513 119.453,27.513 120.337,28.397 v1(122.22,28.397) ; v1(125.993,28.397) 127.553,28.397 127.943,28.786 127.943,29.389 ; IC32.5@126.496,29.389 127.943,29.389 ; IC32.8@126.496,33.199 C81.2@128.551,33.199 ; R84.2@130.975,44.8 131.025,44.8 131.8,45.575 TP12.1@131.8,47.88 C80.1@129.244,47.88 128.983,47.88 128.558,47.455 128.558,33.192 C81.2@128.75,33 129.791,33 130.025,32.766 130.025,30.025 129.389,29.389 127.943,29.389
  L1 w0.762: C80.1@129.244,47.88 129.394,48.03 v1(129.394,49.13) ; L10.2@129.394,51.394 L10.2@130,52 ; 130,50 L10.2@130,51.529 132.004,51.529
  L3 w0.254: v1(129.394,49.13) 132.841,52.577 v1(132.841,62.77)
  L4 w0.4: v1(122.22,28.397) v1(125.993,28.397)
P12V0: C29.2 C57.2 IC27.8 L4.1 R47.2 R86.2 rT_J1.28 rT_J1.29 T_C1.2 T_C9.2 T_C10.2 T_D5.1 T_FL1.2 T_IC1.1 T_J2.28 T_J2.29 T_J4.A1 T_J4.D1 T_J4.E1 T_J4.G1 T_J4.H1 T_J4.J1 T_J4.K1 T_R3.2 T_R4.1 T_R29.2 TP2.1 | length 367.4
  L1 w0.3: IC27.8@131.691,9.792 131.841,9.642 131.841,8.809 132.025,8.625 C29.2@132.025,8.2 ; T_C1.2@151.925,10.483 v1(151.925,11.035) ; T_C1.2@152.25,10.2 T_IC1.1@153.925,10.2 154.951,10.2 155.414,9.737 155.414,7.849 155.658,7.604 156.349,7.604 156.525,7.429 156.525,6.93 T_R4.1@156.52,6.925 ; T_C1.2@152.575,10.483 v1(152.575,11.035) ; T_R29.2@168.2,15.5 168.2,16.899 172.221,20.92 T_J2.29@173.73,20.92 ; R47.2@179.977,4.219 TP2.1@179.977,5.803 ; TP2.1@180.375,5.874 v1(180.927,5.874)
  L1 w0.35: v1(12.008,89.728) 12.289,89.447 12.735,89.447 T_R3.2@12.85,89.332 ; C29.2@132.025,8.2 v1(132.676,8.2)
  L1 w0.762: v2@111.944,79.081 R86.2@111.944,80.58
  L1 w1: v2(153.275,53.4) 163.5,63.625 163.5,68.1 L4.1@163.4,68.2 C57.2@166,68.2 184.962,68.2 ; T_D5.1@165.3,76.65 165.3,73.78 T_C10.2@165.33,73.75 T_C9.2@167.73,73.75 167.73,75.15 168.63,76.05 T_FL1.2@171.15,76.05 ; 171.15,69.014 T_FL1.2@171.15,76.05 ; T_FL1.2@171.15,76.1 T_FL1.2@171.15,76.05
  L1 w1.5: 184.962,68.2 194.677,58.486 194.677,24.48 193.656,23.46
  L4 w0.2: v1(12.008,89.728) 14.102,91.821 87.857,91.821 93.865,85.813 93.865,84.763 94.237,84.391 109.484,84.391 110.95,82.925 110.95,80.049 v2(111.944,79.055)
  L4 w0.3: v1@151.954,11.105 160.424,19.575 172.527,19.575
  L4 w0.35: v1(132.676,8.2) 148.97,8.2 151.776,11.007 151.856,11.007 151.876,11.027 151.876,11.084 151.933,11.084 v1@151.954,11.105
  L4 w0.5: v1(180.927,5.874) 181.46,5.341 183.25,5.341 184.97,7.061 184.97,12.72 186.425,14.175
  L4 w0.508: 134.255,51.63 134.285,51.6 134.325,51.56
  L4 w0.762: v2(111.944,79.055) 111.944,76.794 110.85,75.7 110.85,58.75 112.244,57.356 119.269,57.356 125.025,51.6 134.285,51.6 151.475,51.6 v2(153.275,53.4)
  L4 w1: rT_J1.29@188.73,20.92 rT_J1.28@191.27,23.46
P12V0A: C8A.1 C8B.1 C8C.1 C8D.1 C8E.1 C8F.1 C8G.1 C8H.1 C9A.2 C9B.2 C9C.2 C9D.2 C9E.2 C9F.2 C9G.2 C9H.2 C13A.2 C13B.2 C13C.2 C13D.2 C13E.2 C13F.2 C13G.2 C13H.2 C38.1 C39.2 C40.1 C104.2 D1A.2 D1B.2 D1C.2 D1D.2 D1E.2 D1F.2 D1G.2 D1H.2 D2A.2 D2B.2 D2C.2 D2D.2 D2E.2 D2F.2 D2G.2 D2H.2 D5.1 IC1A.8 IC1B.8 IC1C.8 IC1D.8 IC1E.8 IC1F.8 IC1G.8 IC1H.8 IC2A.8 IC2B.8 IC2C.8 IC2D.8 IC2E.8 IC2F.8 IC2G.8 IC2H.8 IC21.1 IC35.8 R48.2 R51.2 TP7.1 | length 187.5
  L1 w0.203: C8H.1@70.329,13.658 71.129,13.658 71.632,14.161 73.364,14.161 73.475,14.05 C9H.2@73.475,13.55 73.275,13.35 IC2H.8@73.275,11.967 ; C8G.1@70.329,23.658 71.129,23.658 71.632,24.161 73.364,24.161 73.475,24.05 C9G.2@73.475,23.55 ; C8F.1@70.329,33.658 71.129,33.658 71.632,34.161 73.364,34.161 73.475,34.05 C9F.2@73.475,33.55 ; C8E.1@70.329,43.658 71.129,43.658 71.632,44.161 73.364,44.161 73.475,44.05 C9E.2@73.475,43.55 ; C8D.1@70.329,53.658 71.129,53.658 71.632,54.161 73.364,54.161 73.475,54.05 C9D.2@73.475,53.55 ; C8B.1@70.329,73.658 71.129,73.658 71.632,74.161 73.364,74.161 73.475,74.05 C9B.2@73.475,73.55 ; C8A.1@70.329,83.658 71.129,83.658 71.632,84.161 73.364,84.161 73.475,84.05 C9A.2@73.475,83.55 ; C8C.1@70.341,63.614 71.141,63.614 71.639,64.111 ; 71.632,64.111 71.639,64.111 ; 71.645,64.117 71.639,64.111 ; IC2G.8@73.275,21.967 73.275,23.258 C9G.2@73.465,23.448 ; IC2F.8@73.275,31.967 73.275,33.258 C9F.2@73.465,33.448 ; IC2E.8@73.275,41.967 73.275,43.258 C9E.2@73.465,43.448 ; IC2D.8@73.275,51.967 73.275,53.258 C9D.2@73.465,53.448 ; IC2B.8@73.275,71.967 73.275,73.258 C9B.2@73.465,73.448 ; IC2A.8@73.275,81.967 73.275,83.258 C9A.2@73.465,83.448 ; IC2C.8@73.288,61.923 73.288,63.214 C9C.2@73.478,63.404 ; C9C.2@73.475,63.5 73.475,64 73.364,64.111 71.639,64.111 ; v1(85.644,14.255) 85.694,14.205 C13H.2@85.694,13.43 86.144,12.98 86.144,12.755 86.969,11.93 IC1H.8@86.969,11.309 ; v1(85.644,24.255) 85.694,24.205 C13G.2@85.694,23.43 86.144,22.98 86.144,22.755 86.969,21.93 IC1G.8@86.969,21.309 ; v1(85.644,34.255) 85.694,34.205 C13F.2@85.694,33.43 86.144,32.98 86.144,32.755 86.969,31.93 IC1F.8@86.969,31.309 ; v1(85.644,44.255) 85.694,44.205 C13E.2@85.694,43.43 86.144,42.98 86.144,42.755 86.969,41.93 IC1E.8@86.969,41.309 ; v1(85.644,54.255) 85.694,54.205 C13D.2@85.694,53.43 86.144,52.98 86.144,52.755 86.969,51.93 IC1D.8@86.969,51.309 ; v1(85.644,74.255) 85.694,74.205 C13B.2@85.694,73.43 86.144,72.98 86.144,72.755 86.969,71.93 IC1B.8@86.969,71.309 ; v1(85.644,84.255) 85.694,84.205 C13A.2@85.694,83.43 86.144,82.98 86.144,82.755 86.969,81.93 IC1A.8@86.969,81.309 ; v1(85.657,64.211) 85.707,64.161 C13C.2@85.707,63.386 86.157,62.936 86.157,62.711 86.982,61.886 IC1C.8@86.982,61.265 ; IC35.8@103.075,58.725 103.383,58.725 103.506,58.848 C104.2@103.506,59.995 ; TP7.1@112.05,51.025 113.025,51.025 113.2,51.2 ; 113.05,48.362 113.05,49.947 113.493,50.39 ; R48.2@113.2,52.76 113.2,51.2 ; R51.2@113.943,47.469 R51.2@113.993,47.469 114.293,47.169 C40.1@114.293,46.298 ; C38.1@114.402,50.39 114.925,50.913 C38.1@114.925,50.922 ; C38.1@115.448,50.398 C38.1@114.925,50.922 ; IC21.1@116.8,50.306 116.998,50.108 IC21.1@117.334,50.108 ; 113.2,51.2 113.375,51.025 C38.1@114.925,51.025 C38.1@114.925,50.922
  L1 w0.35: v1(77.394,85.7) D5.1@77.394,86.605 ; D5.1@77.394,87.655 v1(77.394,88.56) ; v1(78.644,85.7) D5.1@78.644,86.605 ; D5.1@78.644,87.655 v1(78.644,88.56)
  L1 w0.4: C104.2@103.506,59.995 103.615,60.104 105.784,60.104 109.454,56.435 109.454,55.07 ; 113.493,50.39 C38.1@114.402,50.39 ; C38.1@115.448,50.398 115.736,50.398 116.026,50.108 IC21.1@116.998,50.108 ; IC21.1@116.8,50.306 C39.2@116.8,51.425
  L1 w0.508: D1H.2@66.483,12.568 66.483,12.338 67.327,11.494 v1(68.457,11.494) ; D1G.2@66.483,22.568 66.483,22.338 67.327,21.494 v1(68.457,21.494) ; D1F.2@66.483,32.568 66.483,32.338 67.327,31.494 v1(68.457,31.494) ; D1E.2@66.483,42.568 66.483,42.338 67.327,41.494 v1(68.457,41.494) ; D1D.2@66.483,52.568 66.483,52.338 67.327,51.494 v1(68.457,51.494) ; D1B.2@66.483,72.568 66.483,72.338 67.327,71.494 v1(68.457,71.494) ; D1A.2@66.483,82.568 66.483,82.338 67.327,81.494 v1(68.457,81.494) ; D1C.2@66.496,62.524 66.496,62.294 67.339,61.45 v1(68.47,61.45) ; v1(67.428,6.304) 67.446,6.322 D2H.2@68.338,6.322 ; v1(67.428,16.304) 67.446,16.322 D2G.2@68.338,16.322 ; v1(67.428,26.304) 67.446,26.322 D2F.2@68.338,26.322 ; v1(67.428,36.304) 67.446,36.322 D2E.2@68.338,36.322 ; v1(67.428,46.304) 67.446,46.322 D2D.2@68.338,46.322 ; v1(67.428,66.304) 67.446,66.322 D2B.2@68.338,66.322 ; v1(67.428,76.304) 67.446,76.322 D2A.2@68.338,76.322 ; v1(67.44,56.26) 67.459,56.278 D2C.2@68.35,56.278 ; v1(69.135,13.653) 69.14,13.658 C8H.1@70.329,13.658 ; v1(69.135,23.653) 69.14,23.658 C8G.1@70.329,23.658 ; v1(69.135,33.653) 69.14,33.658 C8F.1@70.329,33.658 ; v1(69.135,43.653) 69.14,43.658 C8E.1@70.329,43.658 ; v1(69.135,53.653) 69.14,53.658 C8D.1@70.329,53.658 ; v1(69.135,73.653) 69.14,73.658 C8B.1@70.329,73.658 ; v1(69.135,83.653) 69.14,83.658 C8A.1@70.329,83.658 ; v1(69.148,63.609) 69.152,63.614 C8C.1@70.341,63.614
  L4 w1.27: v1(85.644,84.255) 86.319,84.255 87.045,84.981 90.892,84.981 93.802,82.071 105.579,82.071 107.618,80.032 107.618,57.307 109.9,55.025
  other v2: 110.65,53.6 109.775,54.438 110.65,55.275
P13V0: C37.2 C43.2 C47.1 C51.2 IC21.8 IC22.1 IC22.3 IC23.1 L3.2 R41.2 R46.2 TP1.1 | length 106.4
  L1 w0.203: IC22.3@121.044,17.115 IC22.3@121.047,17.111
  L1 w0.25: IC22.1@121.094,15.169 IC22.1@121.044,15.169 120.269,15.169 119.714,15.723 119.714,16.614 120.169,17.069 IC22.3@121.044,17.069 IC22.3@121.094,17.069
  L1 w0.5: TP1.1@112.05,71.9 112.05,73.38 ; L3.2@114.5,73.6 R46.2@114.5,76.21 ; 120.694,51.425 120.719,51.4 124.375,51.4 124.675,51.1 124.675,50.213 C37.2@124.679,50.209 124.578,50.108 IC21.8@122.734,50.108 ; IC23.1@121.094,11.669 121.119,11.694 121.776,11.694 122.044,11.962 122.044,14.434 ; IC22.1@121.094,15.169 121.794,15.169 122.044,14.919 122.044,14.434 ; C47.1@123.875,14.8 123.509,14.434 122.044,14.434
  L1 w0.762: 110.444,71.671 R41.2@110.444,80.58 ; 110.448,71.771 110.448,62.649 113.01,60.088 116.237,60.088 120.694,55.631 120.694,51.425 120.694,46.094 124.724,42.064 124.724,20.224 122.975,18.475 C43.2@122.975,16.8 123.069,16.706 123.069,15.881 123.875,15.075 C47.1@123.875,14.8 ; 110.494,70.2 C51.2@115.819,70.2 ; 110.558,73.4 L3.2@114.3,73.4
  L1 w1.016: L3.2@114.3,73.4 L3.2@114.5,73.6
P13V0S: C48.2 IC25.7 L2.1 R56.2 | length 23.3
  L1 w0.203: 125.194,70.58 R56.2@126.944,70.58
  L1 w1.27: C48.2@122.194,83.48 121.944,83.23 L2.1@121.944,81.23 124.594,81.23 125.194,80.63 125.194,70.58 125.194,69.88 126.022,69.052 128.101,69.052 IC25.7@129.294,70.245
PGIA-CS: IC11.5 IC19.12 IC20.12 | length 183.2
  L1 w0.127: v1(101.297,76.9) IC19.12@102.399,76.9 ; IC20.12@102.399,8.437 v1(103.501,8.437)
  L1 w0.152: v1(161.075,12.875) 161.075,15.756 172.315,26.996 178.554,26.996 180.125,25.425 181.028,25.425 181.227,25.227 IC11.5@181.227,25.02
  L4 w0.152: v1(101.297,76.9) 103.55,76.9 104,76.45 104,75.801 103.824,75.625 103.51,75.625 103.037,75.152 103.037,74.613 103.563,74.086 103.563,62.773 102.075,61.285 102.075,59.152 102.39,58.837 102.39,45.89 101.75,45.25 101.75,44.7 102.05,44.4 102.05,41.5 101.161,40.611 101.161,34.214 101.814,33.561 101.814,29.136 101.942,29.008 101.942,28.358 103.499,26.801 103.499,22.066 105.833,19.732 109.65,19.732 111.27,18.113 111.27,15.355 106.404,10.489 103.464,10.489 102.875,9.9 102.875,9.062 v1(103.501,8.437) 104.312,7.625 105.925,7.625 107.72,5.83 119.52,5.83 125.82,-0.47 141.974,-0.47 154.329,11.885 155.474,11.885 157.014,13.425 160.525,13.425 v1(161.075,12.875)
PGIA-MISO: IC10.5 IC20.9 | length 99.3
  L1 w0.152: IC20.9@102.399,6.487 IC20.9@102.4,6.486 ; IC20.9@102.4,6.487 104.817,6.487 v1@104.818,6.486 ; v1(160.15,12.875) 160.15,15.731 171.969,27.55 179.441,27.55 181.227,29.336 IC10.5@181.227,30.27
  L4 w0.152: v1(104.818,6.487) 105.784,6.487 107.345,4.925 119.145,4.925 125.445,-1.375 142.349,-1.375 150.099,6.375 153.35,6.375 153.73,6.755 153.73,9.922 154.788,10.98 156.809,10.98 158.704,12.875 v1(160.15,12.875)
PGIA-MOSI: IC9.5 IC19.14 | length 192.4
  L1 w0.127: v1(101.297,78.2) IC19.14@102.399,78.2
  L1 w0.152: v1(159.325,12.275) 159.325,15.981 172.875,29.531 177.427,29.531 180.347,32.451 180.347,33.685 181.227,34.565 IC9.5@181.227,35.52
  L4 w0.152: v1(101.297,78.2) 100.745,77.648 100.745,75.564 102.6,73.71 102.6,65.323 102.811,65.112 102.811,64.611 102.65,64.45 102.65,63.268 101.111,61.729 101.111,58.464 101.375,58.2 101.375,45.9 100.94,45.465 100.94,41.94 99.8,40.8 99.35,40.8 98.975,40.425 98.975,34.405 99.33,34.049 99.801,34.049 100.894,32.956 100.894,29.362 100.652,29.119 100.652,27.968 102.558,26.062 102.558,21.677 105.374,18.86 108.932,18.86 110.145,17.647 110.145,15.821 105.798,11.474 103.034,11.474 100.563,9.003 100.563,8.523 101.036,8.05 102.543,8.05 104.586,6.007 105.662,6.007 107.169,4.5 118.969,4.5 125.269,-1.8 142.525,-1.8 150.275,5.95 153.526,5.95 154.155,6.579 154.155,9.746 154.964,10.555 157.605,10.555 v1(159.325,12.275)
PGIA-SCK: IC8.5 IC19.11 IC20.11 | length 192.1
  L1 w0.127: IC19.11@102.399,76.25 v1(103.501,76.25)
  L1 w0.152: v1(157.875,12.725) 157.875,15.556 172.353,30.034 176.792,30.034 179.542,32.784 179.542,38.067 181.227,39.752 IC8.5@181.227,40.77
  L1 w0.203: v1(101.05,8.825) 101.05,8.125 101.388,7.787 IC20.11@102.399,7.787
  L4 w0.152: v1(103.501,76.25) 102.591,75.34 102.591,74.432 103.104,73.919 103.104,63.116 101.59,61.602 101.59,58.776 101.851,58.515 101.851,45.908 101.35,45.406 101.35,44.446 101.492,44.304 101.492,41.792 100.075,40.375 100.075,34.45 101.323,33.202 101.323,29.145 100.999,28.821 100.999,28.297 103.036,26.26 103.036,21.875 105.641,19.27 109.255,19.27 110.664,17.862 110.664,15.606 106.078,11.021 103.246,11.021 v1(101.05,8.825) 101.35,8.525 102.716,8.525 104.241,7 105.927,7 107.538,5.39 119.338,5.39 125.638,-0.91 142.157,-0.91 154.512,11.445 155.62,11.445 156.9,12.725 v1(157.875,12.725)
PGOOD: R157.2 T_R5.1 T_T1.1 | length 224.7
  L1 w0.152: v1(10.67,88.865) T_T1.1@11.575,88.865 ; T_R5.1@125.08,0.9 124.4,0.9 122.175,3.125 119.1,3.125 118.675,3.55 118.675,6.575 119.075,6.975 123.8,6.975 125.964,9.139 v1(125.964,16.801) ; v1(126.819,18.688) 126.819,24.694 131.1,28.975 131.1,41.514 ; R157.2@129.7,43.5 129.705,43.495 129.705,42.909 131.1,41.514 ; v1(133.575,50.825) 133.575,42.4 132.689,41.514 131.1,41.514
  L4 w0.15: v1(10.67,88.865) 11.815,88.865 14.457,91.507 87.727,91.507 93.551,85.683 93.551,84.633 94.107,84.077 109.354,84.077 110.636,82.795 110.636,76.952 110.094,76.41 110.094,58.331 111.965,56.46 119.071,56.46 124.706,50.825 v1(133.575,50.825)
  L4 w0.152: v1(125.964,16.801) 125.964,17.314 126.819,18.169 v1(126.819,18.688)
PSU_EN: IC31.3 LD14.3 T_IC6.3 T_IC7.1 T_R8.1 | length 259.1
  L1 w0.152: IC31.3@137.691,60.02 138.533,60.02 138.547,60.007 138.955,60.007 v1(139.192,59.77) ; v1@141.8,50.269 141.8,47.85 143.608,46.042 143.608,45.017 ; T_R8.1@141.875,42.184 141.875,42.73 141.621,42.984 140.909,42.984 140.692,43.202 140.692,44.822 140.887,45.017 141.782,45.017 T_IC6.3@141.875,45.017 143.608,45.017 ; T_IC7.1@165.969,9.386 165.969,9.574 165.745,9.798 164.346,9.798 162.42,11.723 148.577,11.723 144.6,15.7 144.6,44.025 143.608,45.017
  L3 w0.152: v1@141.8,50.269 v1(141.8,50.351) v1(141.8,56.2)
  L4 w0.152: LD14.3@4.18,82.4 7.25,85.47 7.25,89.988 8.337,91.075 9.025,91.075 9.85,90.25 9.85,88.875 10.332,88.393 11.743,88.393 14.573,91.223 87.609,91.223 93.267,85.565 93.267,84.515 93.989,83.793 109.236,83.793 110.351,82.677 110.351,77.07 109.809,76.527 109.809,58.213 111.847,56.175 118.953,56.175 124.777,50.351 v1@141.767,50.351 ; v1(139.192,59.77) 139.192,57.109 140.1,56.2 v1(141.8,56.2)
REF_P1V7066: IC35.1 R7A.1 R7B.1 R7C.1 R7D.1 R7E.1 R7F.1 R7G.1 R7H.1 R83.2 RN2A.5 RN2A.8 RN2B.5 RN2B.8 RN2C.5 RN2C.8 RN2D.5 RN2D.8 RN2E.5 RN2E.8 RN2F.5 RN2F.8 RN2G.5 RN2G.8 RN2H.5 RN2H.8 RN3.3 | length 253.2
  L1 w0.203: v1(76.569,14.631) 76.893,14.955 83.244,14.955 83.469,14.73 R7H.1@83.469,13.88 ; v1(76.569,24.455) 77.169,25.055 82.444,25.055 83.494,24.005 R7G.1@83.494,23.88 ; v1(76.569,34.505) 77.119,35.055 82.319,35.055 R7F.1@83.469,33.905 ; v1(76.569,44.53) 77.194,45.155 82.269,45.155 83.494,43.93 R7E.1@83.494,43.88 ; v1(76.569,64.48) 77.169,65.08 82.269,65.08 R7C.1@83.494,63.855 ; v1(76.569,74.605) 77.069,75.105 82.269,75.105 R7B.1@83.469,73.905 ; v1(76.569,84.63) 77.2,84.63 77.404,84.834 82.54,84.834 R7A.1@83.494,83.88 ; v1(81.494,47.555) 81.524,47.525 RN2D.5@81.524,46.455 ; v1(81.519,37.53) 81.524,37.525 RN2E.5@81.524,36.455 ; v1(81.519,67.53) 81.524,67.525 RN2B.5@81.524,66.455 ; v1(81.519,77.53) 81.524,77.525 RN2A.5@81.524,76.455 ; RN2H.5@81.524,6.455 v1(81.524,7.5) ; RN2G.5@81.524,16.455 v1(81.524,17.51) ; RN2F.5@81.524,26.455 81.524,27.485 v1(81.569,27.53) ; RN2C.5@81.537,56.412 81.537,57.498 v1(81.544,57.505) ; R7D.1@83.494,53.805 83.494,55.054 83.569,55.129 ; v1(84.869,7.83) 85.019,7.68 85.194,7.68 85.334,7.54 RN2H.8@85.334,6.455 ; v1(84.869,17.83) 85.019,17.68 85.194,17.68 85.334,17.54 RN2G.8@85.334,16.455 ; v1(84.869,27.83) 85.019,27.68 85.194,27.68 85.334,27.54 RN2F.8@85.334,26.455 ; v1(84.869,37.83) 85.019,37.68 85.194,37.68 85.334,37.54 RN2E.8@85.334,36.455 ; v1(84.869,47.83) 85.019,47.68 85.194,47.68 85.334,47.54 RN2D.8@85.334,46.455 ; v1(84.869,67.83) 85.019,67.68 85.194,67.68 85.334,67.54 RN2B.8@85.334,66.455 ; v1(84.869,77.83) 85.019,77.68 85.194,77.68 85.334,77.54 RN2A.8@85.334,76.455 ; v1(84.882,57.786) 85.032,57.636 85.207,57.636 85.347,57.496 RN2C.8@85.347,56.412
  L1 w0.3: 95.175,55.129 95.175,51.951 95.486,51.64 96.135,51.64 R83.2@96.3,51.475 96.465,51.64 RN3.3@98.225,51.64
  L1 w0.45: 97.15,58.725 IC35.1@98.675,58.725
  L1 w0.508: v1(76.569,54.43) 77.268,55.129 83.569,55.129 95.175,55.129 95.175,56.75 97.15,58.725
  L3 w0.203: v1(76.569,7.53) 76.599,7.5 v1(81.524,7.5) 84.539,7.5 v1(84.869,7.83) ; v1@76.569,17.506 v1@81.52,17.506 ; v1(76.569,37.782) 76.584,37.782 76.836,37.53 v1(81.519,37.53) 84.569,37.53 v1(84.869,37.83) ; v1(76.569,47.808) 76.584,47.808 76.836,47.555 v1(81.494,47.555) 84.594,47.555 v1(84.869,47.83) ; v1(76.569,67.809) 76.848,67.53 v1(81.519,67.53) 84.569,67.53 v1(84.869,67.83) ; v1(76.569,78.005) 77.044,77.53 v1(81.519,77.53) 84.569,77.53 v1(84.869,77.83) ; v1@76.694,27.53 v1(81.569,27.53) 84.569,27.53 v1(84.869,27.83) ; v1@76.779,57.764 77.038,57.505 v1(81.544,57.505) 84.6,57.505 v1(84.882,57.786) ; v1@81.524,17.48 84.519,17.48 v1(84.869,17.83)
  L4 w0.508: v1(76.569,7.53) v1(76.569,17.531) v1(76.569,37.782) v1(76.569,44.53) v1(76.569,54.43) v1(76.569,67.809) v1(76.569,84.63)
  other v1: 76.569,27.53 76.569,57.733
REF_P2V048: IC35.7 R13A.1 R13B.1 R13C.1 R13D.1 R13E.1 R13F.1 R13G.1 R13H.1 RN3.2 RN4.6 | length 109.9
  L1 w0.203: R13H.1@90.914,14.205 90.914,13.735 91.144,13.505 v1(91.169,13.53) ; R13G.1@90.914,24.205 90.914,23.735 91.144,23.505 v1(91.169,23.53) ; R13F.1@90.914,34.205 90.914,33.735 91.144,33.505 v1(91.169,33.53) ; R13E.1@90.914,44.205 90.914,43.735 91.144,43.505 v1(91.169,43.53) ; R13D.1@90.914,54.205 90.914,53.785 v1(91.169,53.53) ; R13B.1@90.914,74.205 90.914,73.735 91.144,73.505 v1(91.169,73.53) ; v1(90.914,83.501) R13A.1@90.914,84.205 ; R13C.1@90.927,64.161 90.927,63.691 91.157,63.461 v1(91.182,63.486)
  L1 w0.3: v1@93.785,62.877 95.752,62.877 97.103,64.228 100.532,64.228 101.755,63.005 ; RN3.2@98.225,52.91 100.634,52.91 101.335,53.611 101.335,57.667 101.755,58.087 101.755,63.005 ; 101.865,58.082 IC35.7@103.068,58.082 ; RN4.6@103.45,63.59 102.34,63.59 101.755,63.005
  L4 w0.5: v1(90.914,83.501) 90.914,78.561 92.194,77.281 92.194,73.526 ; v1(91.169,13.53) 92.194,14.555 92.194,23.526 ; v1@91.233,23.526 92.194,23.526 ; v1@91.233,33.526 92.194,33.526 ; v1@91.233,43.526 92.194,43.526 ; v1@91.233,53.526 92.194,53.526 ; v1@91.233,73.526 92.194,73.526 ; v1@91.246,63.482 92.194,63.482 ; v1(93.839,62.877) 92.194,62.877 ; 92.194,23.526 92.194,33.526 ; 92.194,33.526 92.194,43.526 ; 92.194,43.526 92.194,53.526 ; 92.194,53.526 92.194,62.877 ; 92.194,62.877 92.194,63.482 ; 92.194,63.482 92.194,73.526
REF_P4V096: C100.2 IC33.7 IC34.7 R59.2 R81.1 R82.2 RN3.4 TP15.1 | length 74.7
  L1 w0.152: C100.2@101.483,20.8 101.792,20.491 102.709,20.491 102.791,20.409 R82.2@103.551,20.409 103.694,20.266 IC34.7@103.694,18.905 IC34.7@103.732,18.943
  L1 w0.35: R59.2@127.925,19.29 v1(128.576,19.29)
  L1 w0.4: v1(94.758,41.34) 94.758,48.008 97.12,50.37 RN3.4@98.225,50.37 ; IC33.7@96.074,18.834 96.074,20.191 96.308,20.425 97.425,20.425 TP15.1@98.375,21.375 ; v1(96.876,26.488) 98.4,24.964 TP15.1@98.4,21.35 ; TP15.1@98.425,21.375 98.87,20.93 R81.1@100.1,20.93 101.353,20.93 C100.2@101.483,20.8 101.729,21.046 106.725,21.046 v1@106.735,21.056
  L4 w0.4: v1(94.758,41.34) 94.758,38.309 95.569,37.498 96.515,37.498 97.239,36.774 97.239,32.464 96.072,31.297 96.072,27.292 v1(96.876,26.488) ; v1(106.735,21.046) 107.576,21.887 112.963,21.887 115.56,19.29 v1(128.576,19.29)
REF_S\H\D\N: D10.1 IC28.7 IC33.1 IC34.1 R69.1 R157.1 | length 92
  L1 w0.152: IC33.1@96.074,14.434 96.074,15.549 96.42,15.895 102.679,15.895 103.093,15.48 ; IC34.1@103.093,14.578 103.093,15.48 ; v1(121.65,18.3) 116.844,18.3 116.488,18.656 115.906,18.656 115.6,18.35 113.765,18.35 112.74,17.325 111.475,17.325 111.125,16.975 111.125,16.5 110.725,16.1 103.713,16.1 103.093,15.48 ; v1(126.3,18.3) 126.3,24.956 130.611,29.267 130.611,41.366 129.1,42.877 129.1,44.275 129.25,44.425 129.685,44.425 R157.1@129.7,44.44 129.7,45.84 D10.1@129.64,45.9 ; D10.1@129.715,45.855 v1(129.715,46.665) ; v1(133.841,54.729) 133.861,54.729 134.374,55.242 139.869,55.242 141.594,56.967 141.594,58.16 142.057,58.623 142.931,58.623 143.42,59.111 143.42,59.853 143.611,60.044 R69.1@143.611,61.02
  L1 w0.254: IC28.7@143.242,62.915 143.611,62.915 143.611,62.881 143.674,62.819 143.698,62.819 143.846,62.67 143.846,61.255 R69.1@143.611,61.02
  L3 w0.152: v1(129.715,46.665) 129.715,48.29 133.841,52.416 v1(133.841,54.729)
  L4 w0.152: v1(121.65,18.3) v1(126.3,18.3)
REF_VCC: C41.2 C42.2 C44.1 C45.2 IC22.5 IC23.5 R49.2 R54.2 R80.1 TP8.1 | length 26.1
  L1 w0.25: C45.2@114.275,15.8 114.275,16.35 115.005,17.08 115.005,17.335 R49.2@115.17,17.5
  L1 w0.4: R80.1@104.491,13.013 105.163,13.013 106.948,14.798 TP8.1@112.05,14.798 C44.1@114.321,14.798 ; C45.2@114.275,15.8 114.321,15.754 C44.1@114.321,14.798 ; C44.1@115.15,13.543 C41.2@116.644,13.543 ; C41.2@116.644,13.319 C41.2@116.644,13.543 ; IC22.5@118.344,15.169 118.338,15.175 117.467,15.175 117.291,14.999 116.893,14.999 R54.2@116.644,14.75 ; C44.1@114.321,14.798 114.321,14.536 C44.1@114.725,14.132 114.725,14.325 115.15,14.75 R54.2@116.644,14.75 ; C41.2@116.644,13.543 R54.2@116.644,14.75
  L1 w0.508: C41.2@116.865,13.098 117.411,13.098 118.098,12.411 IC23.5@118.098,11.69 ; IC23.5@118.098,11.648 118.098,10.666 118.396,10.369 C42.2@119.244,10.369
RSTn: T_D6.1 T_R15.1 | length 14.8
  L1 w0.152: T_D6.1@170.976,9.391 172.814,9.391 173.35,8.855 180.695,8.855 181.675,7.875 183.13,7.875 183.423,8.168 184.144,8.168 184.322,7.99 T_R15.1@185.002,7.99
SB_0: T_J4.I2
SB_1: T_J4.G3
SB_2: T_J4.H3
SB_3: T_J4.J3
SB_4: T_J4.K3
SDR_MODE: IC6.5 T9.1 | length 89.7
  L1 w0.203: T9.1@118.4,34.7 v1(122.3,34.7) ; v1(171.419,33.605) 172.679,34.865 176.882,34.865 178.015,35.998 178.015,42.665 179.95,44.6 179.95,49.057 181.227,50.334 IC6.5@181.227,51.27
  L4 w0.203: v1(122.3,34.7) 141.054,34.7 149.396,43.043 152.402,43.043 156.606,47.247 160.544,47.247 164.922,42.869 164.922,40.102 v1(171.419,33.605)
SERVMOD_3V3: T_IC8.5 T_R17.1 T_R19.2 | length 6.5
  L1 w0.152: T_IC8.5@184.091,4.378 184.091,3.994 184.26,3.825 185.517,3.825 185.876,4.183 186.266,4.183 T_R19.2@186.48,4.397 ; T_R19.2@186.48,4.4 T_R19.2@186.48,4.397 ; T_R17.1@188.78,4.4 188.78,3.93 188.575,3.725 186.695,3.725 186.48,3.94 T_R19.2@186.48,4.397